# EAGLE board sensor (EAGLE 8.7.0)
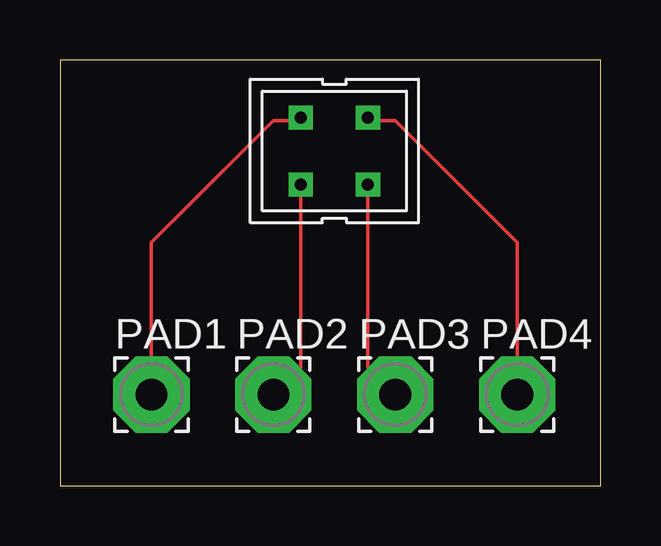
[diagram p0: board, top side]

Size 22.53 x 17.77 mm. Coordinates in mm from the lower left corner, seen from the top.
Outline: 0,0 22.53,0 22.53,17.77 0,17.77 0,0
Copper layers (1*16): Top 0.035mm / dielectric 1.5mm / Bottom 0.035mm
Design rules "default": minimum track width 6mil, minimum drill 0.35mm, track to track 6mil, track to pad 6mil, pad to pad 6mil, via to via 6mil, smd to smd 6mil, copper to edge 40mil, drill to drill 6mil, minimum pad ring 10mil, minimum via ring 8mil, stop-mask expansion 4mil, vias tented up to drill 0mil, thermal gap 10mil

## Footprints (pad centres in the part's own frame; a part is rotated, then mirrored left to right if it is on the bottom)
3,17/1,3 = drill 1.321 pad 3.175 octagon: 1 0,0
CNY70 = drill 0.5 square: A -1.4,1.4; CATH -1.4,-1.4; COLL 1.4,-1.4; E 1.4,1.4

## Placement (x,y rotation side)
PAD1  WIREPAD3,17/1,3  [3,17/1,3]  3.81,3.81 0 top
PAD2  WIREPAD3,17/1,3  [3,17/1,3]  8.89,3.81 0 top
PAD3  WIREPAD3,17/1,3  [3,17/1,3]  13.97,3.81 0 top
PAD4  WIREPAD3,17/1,3  [3,17/1,3]  19.05,3.81 0 top
U$1  CNY70  [CNY70]  11.43,13.97 0 top

## Library data of the parts
PAD1-PAD4 = wirepad
U$1 = ferraris_sensor_project

## Nets
N$1: PAD1.1 U$1.A
N$2: PAD2.1 U$1.CATH
N$3: PAD4.1 U$1.E
N$4: PAD3.1 U$1.COLL

## Tracks (layer width: path | path; a pad name or v marks a point on that pad's centre or on a via)
N$1
  Top 0.152: U$1.A 9.9,15.24 8.89,15.24 3.81,10.16 PAD1.1
N$2
  Top 0.152: U$1.CATH 10.03,4.95 PAD2.1
N$3
  Top 0.152: U$1.E 12.96,15.24 13.97,15.24 19.05,10.16 PAD4.1
N$4
  Top 0.152: U$1.COLL 12.83,4.95 PAD3.1